# Altium PCB ButtonsBrightnessPCB.PcbDoc
Units mm, origin at the board's own origin, x right, y up, seen from the top; angles counter-clockwise.
Board outline 63.88 x 83.06 mm, 2 copper layers (Top Layer, Bottom Layer); 50 components, 47 nets, 184 pads, 13 vias.
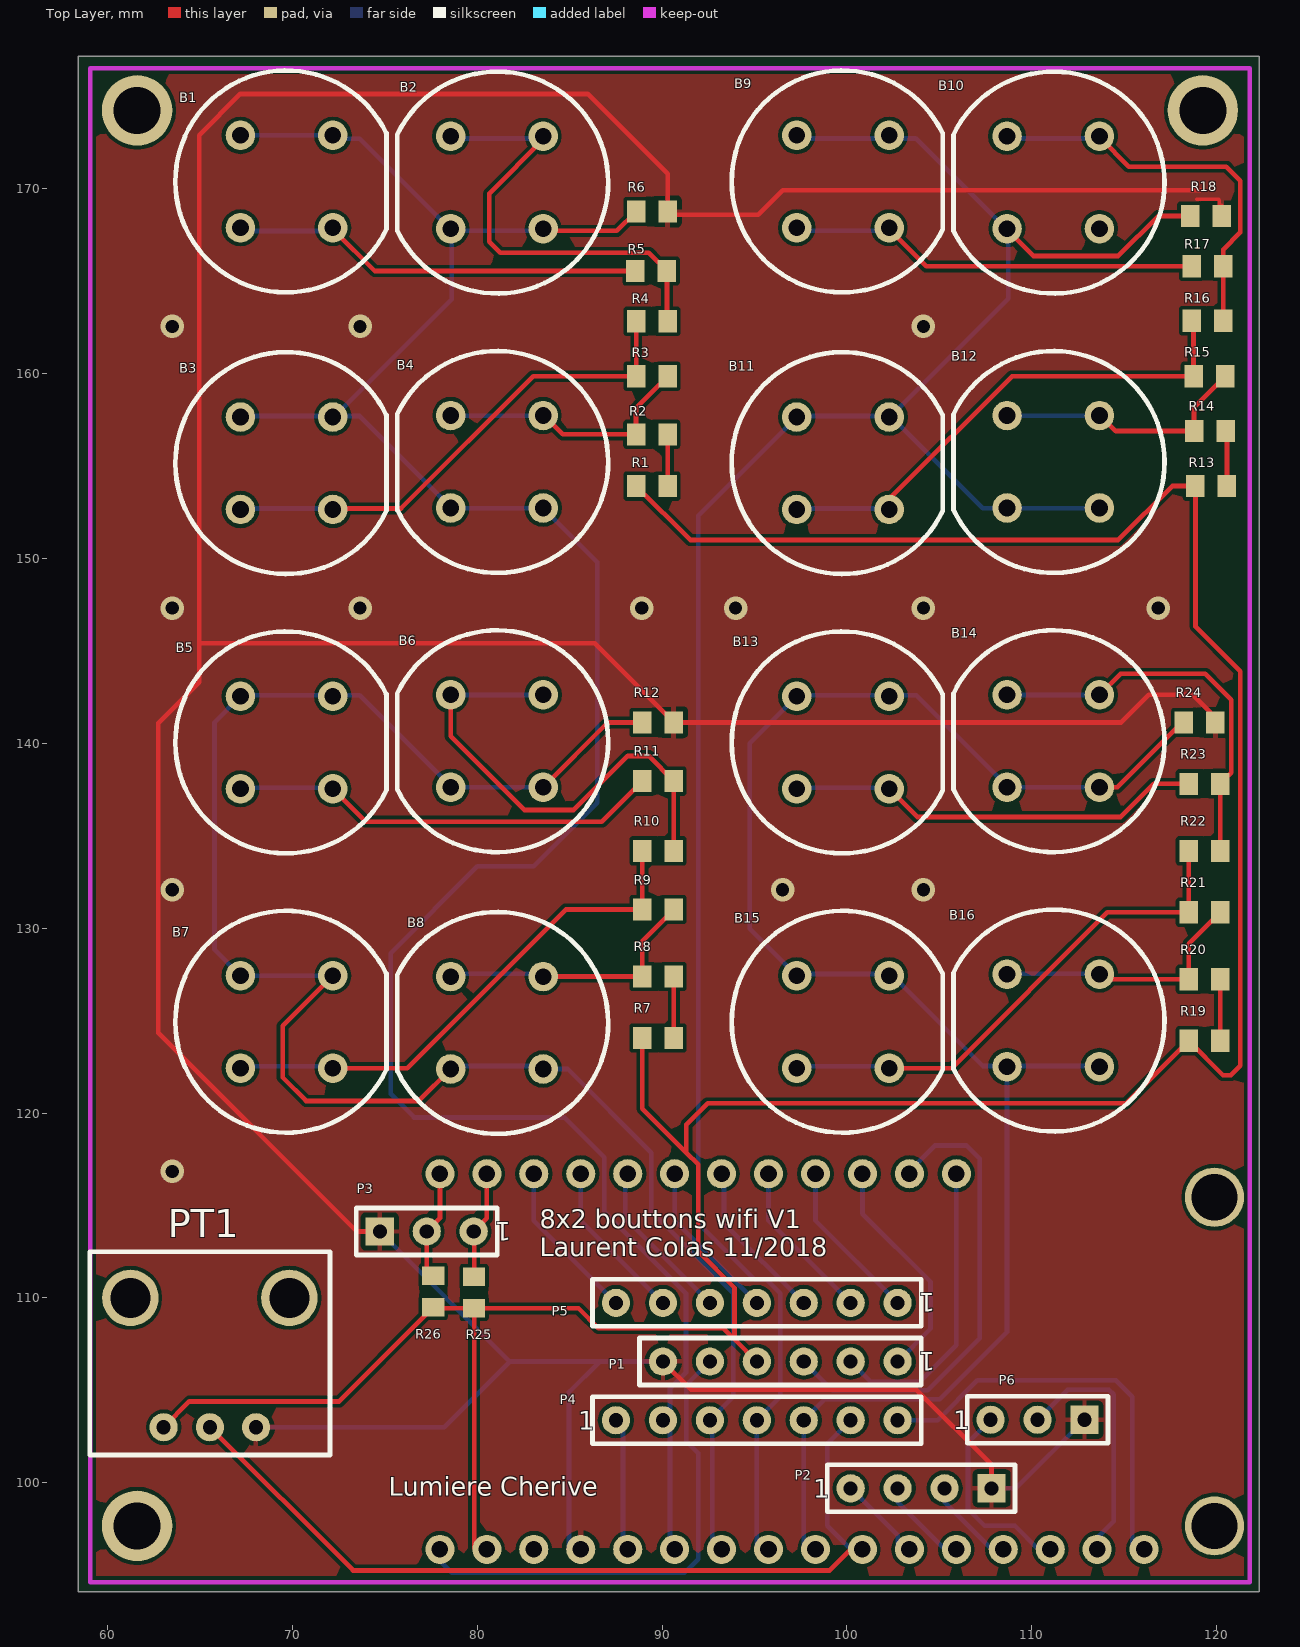
[diagram p0: Top Layer view]
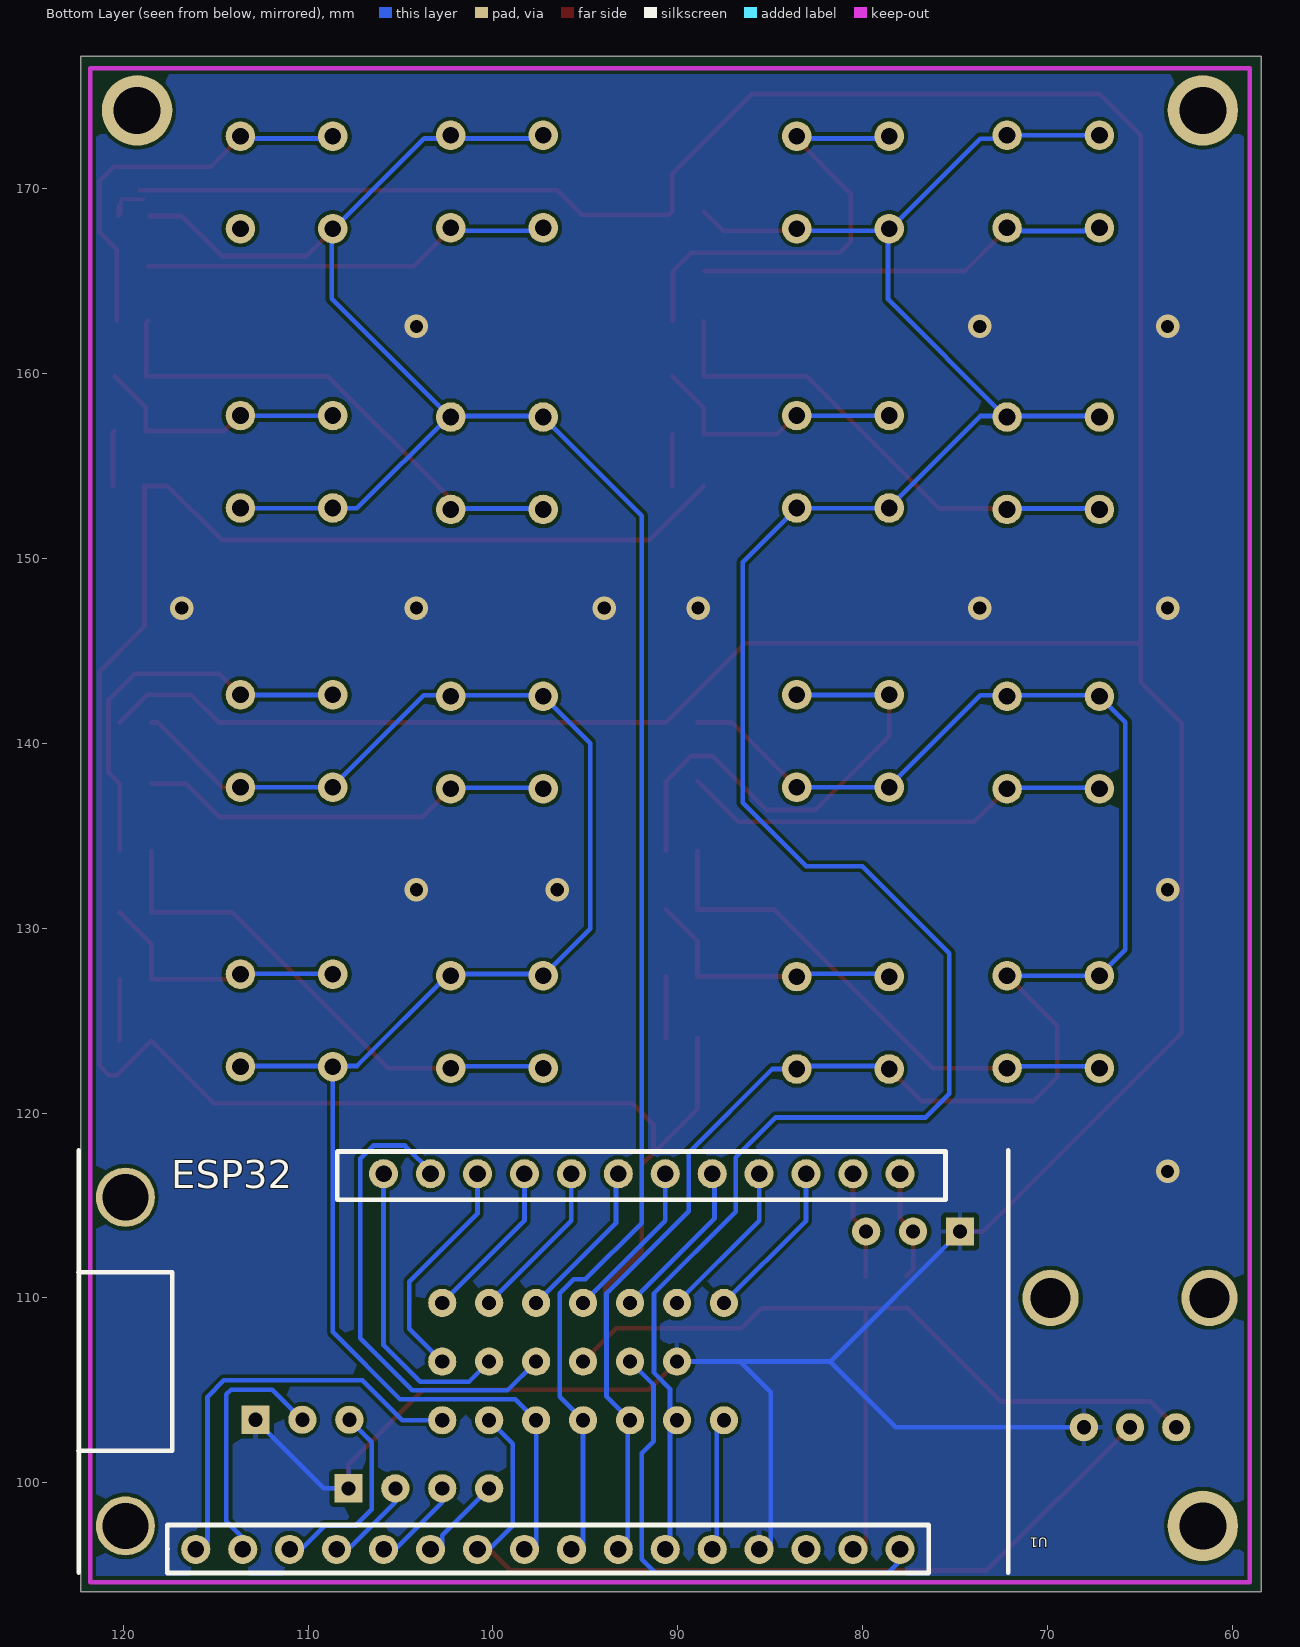
[diagram p1: Bottom Layer view, seen from below]

## Layer stack, top to bottom
Top Solder: solder mask 0.0102, Solder Resist, Dk 3.5
Top Layer: signal copper 0.0356
Dielectric 1: dielectric 0.32, FR-4, Dk 4.8
Bottom Layer: signal copper 0.0356
Bottom Solder: solder mask 0.0102, Solder Resist, Dk 3.5

## Board outline
58.42,94.107 122.301,94.107 122.301,177.165 58.42,177.165

## Design rules (kind name [scope] priority, off if disabled: settings)
Clearance [All] p1: gap=0.203 ignorepadtopadclearanceinfootprint=FALSE
PolygonConnect PolygonConnect_7 [All vs IsNamedPolygon('Bottom Layer-No Net')] p1: thpad.connectstyle=Relief thpad.reliefconductorwidth=0.254 thpad.reliefentries=4 thpad.polygonreliefangle="90 Angle" thpad.airgapwidth=0.254 smdpad.connectstyle=Relief smdpad.reliefconductorwidth=0.254 smdpad.reliefentries=4 smdpad.polygonreliefangle="90 Angle" smdpad.airgapwidth=0.254 via.connectstyle=Direct via.reliefconductorwidth=0.254 via.reliefentries=4 via.polygonreliefangle="90 Angle" via.airgapwidth=0.254
PolygonConnect PolygonConnect_6 [All vs IsNamedPolygon('Bottom Layer-No Net') Or  IsNamedPolygon('Top Layer-No Net')] p2: thpad.connectstyle=Relief thpad.reliefconductorwidth=0.254 thpad.reliefentries=4 thpad.polygonreliefangle="90 Angle" thpad.airgapwidth=0.254 smdpad.connectstyle=Relief smdpad.reliefconductorwidth=0.254 smdpad.reliefentries=4 smdpad.polygonreliefangle="90 Angle" smdpad.airgapwidth=0.254 via.connectstyle=Direct via.reliefconductorwidth=0.254 via.reliefentries=4 via.polygonreliefangle="90 Angle" via.airgapwidth=0.254
PolygonConnect PolygonConnect_5 [All vs IsNamedPolygon('Bottom Layer-No Net')] p3: connectstyle=Relief reliefconductorwidth=0.381 reliefentries=4 polygonreliefangle="90 Angle" airgapwidth=0.254
PolygonConnect PolygonConnect_4 [All vs IsNamedPolygon('Top Layer-No Net')] p4: connectstyle=Relief reliefconductorwidth=0.381 reliefentries=4 polygonreliefangle="90 Angle" airgapwidth=0.254
PolygonConnect PolygonConnect_3 [All vs IsNamedPolygon('Bottom Layer-No Net')] p5: connectstyle=Direct reliefconductorwidth=0.254 reliefentries=4 polygonreliefangle="90 Angle" airgapwidth=0.254
PolygonConnect PolygonConnect_2 [All vs IsNamedPolygon('Top Layer-No Net')] p6: connectstyle=Direct reliefconductorwidth=0.254 reliefentries=4 polygonreliefangle="90 Angle" airgapwidth=0.254
PolygonConnect PolygonConnect_1 [All vs IsNamedPolygon('Bottom Layer-No Net')] p7: thpad.connectstyle=Direct thpad.reliefconductorwidth=0.254 thpad.reliefentries=4 thpad.polygonreliefangle="90 Angle" thpad.airgapwidth=0.254 smdpad.connectstyle=Direct smdpad.reliefconductorwidth=0.254 smdpad.reliefentries=4 smdpad.polygonreliefangle="90 Angle" smdpad.airgapwidth=0.254 via.connectstyle=Relief via.reliefconductorwidth=0.254 via.reliefentries=4 via.polygonreliefangle="90 Angle" via.airgapwidth=0.254
PolygonConnect [All] p8: connectstyle=Relief reliefconductorwidth=0.254 reliefentries=4 polygonreliefangle="90 Angle" airgapwidth=0.254
RoutingVias [All] p1: holewidth=0.635 width=1.016 viastyle="Through Hole" minholewidth=0.711 minwidth=1.27 maxholewidth=0.711 maxwidth=1.27
SolderMaskExpansion [All] p1: expansion=0.102
Width [All] p1: maxlimit=0.508 minlimit=0.203 preferedwidth=0.203
30 further rules are at their usual default settings.

## Components (designator, comment, footprint, x,y, rotation, side; value= is the part's Value field where it differs from the comment)
B1 "Button_D6R90" BUTTON_D6R90 72.136,167.894 r180 top
B2 "Button_D6R90" BUTTON_D6R90 78.613,172.847 r0 top
B3 "Button_D6R90" BUTTON_D6R90 72.136,152.654 r180 top
B4 "Button_D6R90" BUTTON_D6R90 78.613,157.734 r0 top
B5 "Button_D6R90" BUTTON_D6R90 72.136,137.541 r180 top
B6 "Button_D6R90" BUTTON_D6R90 78.613,142.621 r0 top
B7 "Button_D6R90" BUTTON_D6R90 72.136,122.428 r180 top
B8 "Button_D6R90" BUTTON_D6R90 78.613,127.381 r0 top
B9 "Button_D6R90" BUTTON_D6R90 102.235,167.894 r180 top
B10 "Button_D6R90" BUTTON_D6R90 108.712,172.847 r0 top
B11 "Button_D6R90" BUTTON_D6R90 102.232,152.654 r180 top
B12 "Button_D6R90" BUTTON_D6R90 108.712,157.734 r0 top
B13 "Button_D6R90" BUTTON_D6R90 102.235,137.541 r180 top
B14 "Button_D6R90" BUTTON_D6R90 108.712,142.621 r0 top
B15 "Button_D6R90" BUTTON_D6R90 102.235,122.428 r180 top
B16 "Button_D6R90" BUTTON_D6R90 108.712,127.508 r0 top
P1 "Header 6" CONN_6 102.743,106.553 r180 top
P2 "Header 4" CONN_4 100.203,99.695 r0 top
P3 "Header 3" CONN_3 79.807,113.589 r180 top
P4 "Header 7" CONN_7 87.503,103.378 r0 top
P5 "Header 7" CONN_7 102.743,109.728 r180 top
P6 "Header 3" CONN_3 107.772,103.403 r0 top
PT1 "P090S_pot" P090S_POT 63.032,102.997 r0 top
R1 "ERJ-6GEYJ471V" RES_0804_PANASONIC 89.454,153.843 r180 top
R2 "ERJ-6GEYJ471V" RES_0804_PANASONIC 89.444,156.793 r0 top
R3 "ERJ-6GEYJ471V" RES_0804_PANASONIC 89.454,159.786 r180 top
R4 "ERJ-6GEYJ471V" RES_0804_PANASONIC 89.454,162.907 r0 top
R5 "ERJ-6GEYJ471V" RES_0804_PANASONIC 89.408,165.481 r180 top
R6 "ERJ-6GEYJ471V" RES_0804_PANASONIC 89.454,168.85 r0 top
R7 "ERJ-6GEYJ471V" RES_0804_PANASONIC 89.781,123.983 r180 top
R8 "ERJ-6GEYJ471V" RES_0804_PANASONIC 89.781,127.457 r0 top
R9 "ERJ-6GEYJ471V" RES_0804_PANASONIC 89.781,130.932 r180 top
R10 "ERJ-6GEYJ471V" RES_0804_PANASONIC 89.781,134.256 r0 top
R11 "ERJ-6GEYJ471V" RES_0804_PANASONIC 89.781,137.881 r180 top
R12 "ERJ-6GEYJ471V" RES_0804_PANASONIC 89.781,141.205 r0 top
R13 "ERJ-6GEYJ471V" RES_0804_PANASONIC 119.706,153.843 r180 top
R14 "ERJ-6GEYJ471V" RES_0804_PANASONIC 119.634,156.972 r0 top
R15 "ERJ-6GEYJ471V" RES_0804_PANASONIC 119.606,159.786 r180 top
R16 "ERJ-6GEYJ471V" RES_0804_PANASONIC 119.507,162.941 r0 top
R17 "ERJ-6GEYJ471V" RES_0804_PANASONIC 119.507,165.735 r180 top
R18 "ERJ-6GEYJ471V" RES_0804_PANASONIC 119.416,168.604 r0 top
R19 "ERJ-6GEYJ471V" RES_0804_PANASONIC 119.338,123.833 r180 top
R20 "ERJ-6GEYJ471V" RES_0804_PANASONIC 119.338,127.307 r0 top
R21 "ERJ-6GEYJ471V" RES_0804_PANASONIC 119.338,130.782 r180 top
R22 "ERJ-6GEYJ471V" RES_0804_PANASONIC 119.338,134.256 r0 top
R23 "ERJ-6GEYJ471V" RES_0804_PANASONIC 119.338,137.731 r180 top
R24 "ERJ-6GEYJ471V" RES_0804_PANASONIC 119.084,141.205 r0 top
R25 "ERJ-6GEYJ471V" RES_0804_PANASONIC 79.756,110.287 r90 top
R26 "ERJ-6GEYJ471V" RES_0804_PANASONIC 77.546,110.338 r90 top
U1 "ESP32_feather" ESP32_FEATHER 105.918,116.713 r180 bottom

## Footprints (in the part's own frame and the unit in brackets; to place one, negate y for a bottom-side part, rotate by r counter-clockwise, add the part's x,y. Pads: shape width x height; smd on the part's side, far side on the other; paste and mask are expansions set on the pad)
BUTTON_D6R90 [mm]
  round 1.6 hole 0.9: 1(-0.05,0) 2(4.95,0) 3(-0.05,-5) 4(4.95,-5)
  silkscreen extent -2.95,-8.51 8.47,3.49
CONN_3 [mil]
  round 60 hole 30: 1(0,0) 2(100,0)
  rect 60x60 hole 30: 3(200,0)
  silkscreen extent -50,-50 250,50
CONN_4 [mil]
  round 60 hole 30: 1(0,0) 2(100,0) 3(200,0)
  rect 60x60 hole 30: 4(300,0)
  silkscreen extent -50,-50 350,50
CONN_6 [mil]
  round 60 hole 30: 1(0,0) 2(100,0) 3(200,0) 4(300,0) 5(400,0) 6(500,0)
  silkscreen extent -50,-50 550,50
CONN_7 [mil]
  round 60 hole 30: 1(0,0) 2(100,0) 3(200,0) 4(300,0) 5(400,0) 6(500,0) 7(600,0)
  silkscreen extent -50,-50 650,50
ESP32_FEATHER [mil]
  round 62 hole 35.43: 1(0,0) 2(100,0) 3(200,0) 4(300,0) 5(400,0) 6(500,0) 7(600,0) 8(700,0) 9(800,0) 10(900,0) 11(1000,0) 12(1100,0) 13(1100,-800) 14(1000,-800) 15(900,-800) 16(800,-800) 17(700,-800) 18(600,-800) 19(500,-800) 20(400,-800) 21(300,-800) 22(200,-800) 23(100,-800) 24(0,-800) 25(-100,-800) 26(-200,-800) 27(-300,-800) 28(-400,-800)
  round 125.98 hole 98.43: S1(-550,-50) S2(-550,-750)
  silkscreen extent -650,-850 1331,50
P090S_POT [mil]
  round 60 hole 30: 1(0,0) 2(98.43,0) 3(196.85,0)
  round 120 hole 85: 4(-70.87,275.59) 4(267.72,275.59)
  silkscreen extent -157,-59 354,374
RES_0804_PANASONIC [mm]
  rect 1.006x1.2 smd: 1(-0.853,-0.075) 2(0.853,-0.075)

## Part data
P1: "Header, 6-Pin", LatestRevisionDate=17-Jul-2002, LatestRevisionNote="Re-released for DXP Platform.", Publisher="Altium Limited"
P2: "Header, 4-Pin", LatestRevisionDate=17-Jul-2002, LatestRevisionNote="Re-released for DXP Platform.", Publisher="Altium Limited"
P3 P6: "Header, 3-Pin", LatestRevisionDate=17-Jul-2002, LatestRevisionNote="Re-released for DXP Platform.", Publisher="Altium Limited"
P4 P5: "Header, 7-Pin", LatestRevisionDate=17-Jul-2002, LatestRevisionNote="Re-released for DXP Platform.", Publisher="Altium Limited"
R1 R2 R3 R4 R5 R6 R7 R8 R9 R10 R11 R12 R13 R14 R15 R16 R17 R18 R19 R20 R21 R22 R23 R24 R25 R26: Built_By=EMA_UL_Team, C="Copyright (C) 2015 Accelerated Designs. All rights reserved", Manufacturer_Part_Number=ERJ-6GEYJ471V, Vendor=Panasonic

## Free pads (board coordinates)
  round 3.81 hole 2.54: 8(61.595,97.663) 8(61.595,174.244) 9(119.253,174.244)

## Via types
v1: diameter 1.27, hole 0.711, Top Layer to Bottom Layer, 13 vias

## Nets (pads, with @x,y where several pads share a name; then routed paths per layer and width w, separated by ;. In a path a pad name is that pad's centre, name@x,y a point inside that pad or via, vN(x,y) a via of type N, cw(c..) or ccw(c..) an arc to the next point about the centre after c; other vN are vias at no path point)
3.3V: P1.4 PT1.1 R1.2 R7.2 R13.2 R19.2 R25.1 R26.1 U1.14 | length 166.8
  Top Layer w0.254: PT1.1 64.429,104.394 72.53,104.394 R26.1 77.672,109.434 R25.1 ; U1.14@79.883,96.393 79.831,96.445 R25.1 ; R1.2 91.516,151.003 114.681,151.003 117.596,153.918 R13.2 118.853,146.323 121.285,143.891 121.285,122.555 120.777,122.047 120.346,122.047 R19.2 115.1,120.523 92.463,120.523 91.313,119.373 91.313,117.856 ; R7.2 88.928,120.241 91.313,117.856 ; P1.4 93.916,107.759 ; R25.1 85.476,109.434 86.553,108.356 93.32,108.356 93.916,107.759 ; 91.313,117.856 91.948,117.221 91.948,112.522 93.916,110.553 93.916,107.759
A0: P4.1 U1.17 | length 7
  Bottom Layer w0.254: U1.17@87.884,96.393 P4.1@87.884,103.378
A1: B1.3 B1.4 B2.3 B2.4 B3.3 B3.4 B4.3 B4.4 P4.2 R6.1 U1.18 | length 131.2
  Top Layer w0.254: B2.4@83.625,167.725 87.551,167.725 R6.1
  Bottom Layer w0.254: B1.4 B1.3 ; B3.4@67.3,157.708 B3.3@72.3,157.708 ; B1.3@72.298,172.718 73.632,172.718 B2.3@78.625,167.725 ; B4.4 B4.4@83.572,152.725 ; B2.4@83.625,167.725 B2.3@78.625,167.725 ; U1.18@90.424,96.393 U1.18@90.424,96.647 ; U1.18 U1.18@90.424,96.647 ; B3.3@72.3,157.708 73.642,157.708 78.625,152.725 B4.4@83.572,152.725 ; B3.3@72.3,157.708 78.625,164.033 B2.3@78.625,167.725 ; B4.4@83.572,152.725 86.487,149.81 86.487,136.779 83.058,133.35 80.01,133.35 75.311,128.651 75.311,121.031 76.581,119.761 84.709,119.761 86.868,117.602 86.868,114.661 91.288,110.241 91.288,105.943 90.424,105.08 90.424,103.759 P4.2 90.424,102.997 U1.18@90.424,96.647
A2: B5.3 B5.4 B6.3 B6.4 B7.3 B7.4 B8.3 B8.4 P4.3 R12.1 U1.19 | length 99.8
  Top Layer w0.254: B7.3 69.469,124.711 69.469,121.92 70.736,120.653 76.835,120.653 B8.3 ; B6.4 87.072,141.13 R12.1
  Bottom Layer w0.254: B5.4 65.786,141.141 65.786,128.828 B7.4 B7.3 ; B5.4@67.298,142.6 73.642,142.6 78.625,137.617 B6.4@83.625,137.617 ; B8.3@78.625,122.542 B8.4@83.625,122.542 ; B8.4 84.883,122.381 89.408,117.856 89.408,114.681 93.853,110.236 93.853,104.648 92.71,103.505 U1.19@92.71,96.52
A3: B9.3 B9.4 B10.3 B11.3 B11.4 B12.3 B12.4 P4.4 R18.1 U1.20 | length 122
  Top Layer w0.254: B10.3@108.725,167.725 110.08,166.37 114.681,166.37 116.84,168.529 R18.1
  Bottom Layer w0.254: U1.20@95.123,96.393 P4.4 96.393,104.648 96.393,110.236 95.631,110.998 94.996,110.998 91.948,114.046 91.948,152.32 B11.4 ; B11.4@97.375,157.708 B11.3@102.375,157.708 ; B9.4@97.375,172.725 103.725,172.725 108.725,167.725 108.725,164.058 B11.3@102.375,157.708 ; B12.4@113.725,152.725 107.358,152.725 B11.3@102.375,157.708
A4: B13.3 B13.4 B14.3 B14.4 B15.3 B15.4 B16.3 B16.4 P4.5 R24.1 U1.21 | length 94.6
  Top Layer w0.254: B14.4 114.634,137.621 118.143,141.13 R24.1 R24.1@118.485,141.13
  Bottom Layer w0.254: B15.4 94.742,129.971 94.742,139.998 B13.4 ; B15.4@97.375,127.525 102.375,127.525 107.358,122.542 B16.4@113.725,122.542 ; B13.4@97.375,142.6 103.742,142.6 108.725,137.617 B14.4@113.725,137.617 ; U1.21@97.663,96.393 P4.5 98.806,104.521 105.029,104.521 108.662,108.154 B16.3
A5: P4.6 PT1.2 U1.22 | length 46.4
  Top Layer w0.254: PT1.2 73.279,95.25 99.06,95.25 U1.22@100.203,96.393
  Bottom Layer w0.254: U1.22@100.203,96.393 98.933,97.663 98.933,102.108 P4.6
BAT: P1.2 U1.1 | length 16.5
  Bottom Layer w0.254: P1.2 101.295,105.461 103.937,105.461 105.918,107.442 105.918,116.078 U1.1@105.283,116.713
EN: P1.3 U1.2 | length 26.4
  Bottom Layer w0.254: P1.3 99.212,105.004 104.369,105.004 107.188,107.823 107.188,117.533 106.484,118.237 104.762,118.237 103.238,116.713 U1.2@102.743,116.713
GND: P1.6 P2.4 P3.3 P6.3 PT1.3 R6.2 R12.2 R18.2 R24.2 U1.16 | length 258.6
  Top Layer w0.203: 118.939,169.434 120.096,169.434 120.142,169.388 120.142,168.656 R18.2 R18.2@120.269,169.113
  Top Layer w0.254: P3.3 73.482,113.589 62.738,124.333 62.738,141.097 64.955,143.314 64.955,145.415 ; P1.6 91.567,105.029 103.759,105.029 107.823,100.965 P2.4 ; 119.112,169.926 96.52,169.926 95.198,168.604 90.478,168.604 R6.2 90.307,170.805 85.979,175.133 67.183,175.133 64.955,172.905 64.955,145.415 ; R24.2@120.191,141.13 118.7,142.621 116.337,142.621 114.846,141.13 R12.2 86.349,145.415 64.955,145.415
  Bottom Layer w0.254: PT1.3 78.207,102.997 81.763,106.553 ; P3.3 81.763,106.553 ; U1.16@84.963,96.393 84.963,104.902 86.614,106.553 ; P1.6 86.614,106.553 ; P2.4 109.144,99.695 P6.3 ; 81.763,106.553 86.614,106.553
  other v1: 63.5,116.84 63.5,132.08 96.52,132.08 104.14,132.08 63.5,147.32 73.66,147.32 88.9,147.32 93.98,147.32 104.14,147.32 116.84,147.32 63.5,162.56 73.66,162.56 104.14,162.56
IO12: P5.2 U1.5 | length 9.1
  Bottom Layer w0.254: U1.5@95.123,116.713 95.758,116.078 95.758,114.173 P5.2
IO13: P5.1 U1.4 | length 9.1
  Bottom Layer w0.254: U1.4@97.663,116.713 98.298,116.078 98.298,114.173 P5.1
IO14: P5.7 U1.10 | length 9.1
  Bottom Layer w0.254: U1.10@82.423,116.713 83.058,116.078 83.058,114.173 P5.7
IO15: P5.5 U1.8 | length 9.1
  Bottom Layer w0.254: U1.8@87.503,116.713 88.011,116.205 88.011,114.3 P5.5
IO21: P4.7 U1.28 | length 22.2
  Bottom Layer w0.254: P4.7 104.902,103.378 107.061,105.537 114.554,105.537 115.443,104.648 U1.28@115.443,96.393
IO27: P5.3 U1.6 | length 9.1
  Bottom Layer w0.254: U1.6@92.583,116.713 93.345,115.951 93.345,114.046 P5.3
IO32: P5.6 U1.9 | length 9.1
  Bottom Layer w0.254: U1.9@84.963,116.713 85.598,116.078 85.598,114.173 P5.6
IO33: P5.4 U1.7 | length 9.1
  Bottom Layer w0.254: U1.7@90.043,116.713 90.678,116.078 90.678,114.173 P5.4
MISO: P2.3 U1.25 | length 4.4
  Bottom Layer w0.254: P2.3 105.283,98.933 U1.25@107.823,96.393
MOSI: P2.2 U1.24 | length 4.4
  Bottom Layer w0.254: P2.2 102.743,98.933 U1.24@105.283,96.393
NetB1_1: B1.1 B1.2 R5.2 | length 22.2
  Top Layer w0.254: B1.1@72.298,167.718 74.46,165.556 R5.2
  Bottom Layer w0.254: B1.2@67.298,167.718 B1.1@72.298,167.718
NetB2_1: B2.1 B2.2 R4.2 R5.1 | length 24.8
  Top Layer w0.254: B2.2@83.625,172.725 80.645,169.745 80.645,167.132 81.241,166.536 89.281,166.536 R5.1 90.261,162.878 R4.2
  Bottom Layer w0.254: B2.1@78.625,172.725 B2.2@83.625,172.725
NetB3_1: B3.1 B3.2 R3.2 R4.1 | length 27.2
  Top Layer w0.254: B3.1@72.3,152.708 75.873,152.708 83.026,159.861 R3.2 R4.1
  Bottom Layer w0.254: B3.2@67.3,152.708 B3.1@72.3,152.708
NetB4_1: B4.1 B4.2 R2.1 R3.1 | length 14.3
  Top Layer w0.254: B4.2@83.625,157.794 83.625,157.725 84.632,156.718 R2.1 88.591,158.145 R3.1
  Bottom Layer w0.254: B4.1@78.625,157.725 B4.2@83.625,157.725
NetB5_1: B5.1 B5.2 R11.2 | length 23.4
  Top Layer w0.254: B5.1 73.964,135.763 86.735,135.763 R11.2
  Bottom Layer w0.254: B5.2@67.298,137.6 B5.1@72.298,137.6
NetB6_1: B6.1 B6.2 R10.2 R11.1 | length 26.5
  Top Layer w0.254: B6.1 78.563,140.385 82.55,136.398 85.217,136.398 88.138,139.319 89.271,139.319 R11.1 R10.2
  Bottom Layer w0.254: B6.1@78.625,142.617 B6.2@83.625,142.617
NetB7_1: B7.1 B7.2 R9.2 R10.1 | length 28.5
  Top Layer w0.254: B7.1 76.2,122.428 84.779,131.007 R9.2 R10.1
  Bottom Layer w0.254: B7.2@67.298,122.525 B7.1@72.298,122.525
NetB8_1: B8.1 B8.2 R8.1 R9.1 | length 14.7
  Top Layer w0.254: B8.2 83.564,127.382 R8.1 88.928,129.301 R9.1
  Bottom Layer w0.254: B8.1@78.625,127.542 B8.2@83.625,127.542
NetB9_1: B9.1 B9.2 R17.2 | length 22.1
  Top Layer w0.254: B9.1@102.375,167.725 104.29,165.81 R17.2
  Bottom Layer w0.254: B9.2@97.375,167.725 B9.1@102.375,167.725
NetB10_1: B10.1 B10.2 R16.2 R17.1 | length 21.5
  Top Layer w0.254: B10.2@113.725,172.725 115.254,171.196 120.523,171.196 121.285,170.434 121.285,167.64 120.36,166.715 R17.1 R16.2
  Bottom Layer w0.254: B10.1@108.725,172.725 B10.2@113.725,172.725
NetB11_1: B11.1 B11.2 R15.2 R16.1 | length 27.7
  Top Layer w0.254: B11.1@102.375,152.708 102.375,153.302 108.934,159.861 R15.2 118.753,162.767 R16.1
  Bottom Layer w0.254: B11.2@97.375,152.708 B11.1@102.375,152.708
NetB12_1: B12.1 B12.2 R14.1 R15.1 | length 14.1
  Top Layer w0.254: B12.2@113.725,157.725 114.553,156.897 R14.1 118.781,158.183 R15.1
  Bottom Layer w0.254: B12.1@108.725,157.725 B12.2@113.725,157.725
NetB13_1: B13.1 B13.2 R23.2 | length 22.6
  Top Layer w0.254: B13.1 103.809,136.017 114.808,136.017 116.597,137.806 R23.2
  Bottom Layer w0.254: B13.2@97.375,137.6 B13.1@102.375,137.6
NetB14_1: B14.1 B14.2 R22.2 R23.1 | length 21.6
  Top Layer w0.254: B14.2 114.805,143.764 119.38,143.764 120.795,142.349 120.795,138.41 R23.1 R22.2
  Bottom Layer w0.254: B14.1@108.725,142.617 B14.2@113.725,142.617
NetB15_1: B15.1 B15.2 R21.2 R22.1 | length 28
  Top Layer w0.254: B15.1 105.664,122.428 114.093,130.857 R21.2 R22.1
  Bottom Layer w0.254: B15.2@97.375,122.525 B15.1@102.375,122.525
NetB16_1: B16.1 B16.2 R20.1 R21.1 | length 14.3
  Top Layer w0.254: B16.2 113.938,127.232 R20.1 118.485,129.151 R21.1
  Bottom Layer w0.254: B16.1@108.725,127.542 B16.2@113.725,127.542
NetR1_1: R1.1 R2.2 | length 2.8
  Top Layer w0.254: R2.2 90.307,156.708 R1.1
NetR7_1: R7.1 R8.2 | length 3.3
  Top Layer w0.254: R7.1 R8.2
NetR13_1: R13.1 R14.2 | length 3
  Top Layer w0.254: R14.2 120.559,156.825 R13.1
NetR19_1: R19.1 R20.2 | length 3.3
  Top Layer w0.254: R19.1 R20.2
RST: P1.5 U1.13 | length 26.9
  Bottom Layer w0.254: U1.13@77.343,96.393 78.613,95.123 91.211,95.123 91.948,95.86 91.948,101.6 91.313,102.235 91.313,105.283 P1.5
RX: P6.1 U1.26 | length 10.1
  Bottom Layer w0.254: P6.1 106.553,102.184 106.553,98.552 107.442,97.663 109.093,97.663 U1.26@110.363,96.393
SCK: P2.1 U1.23 | length 4.4
  Bottom Layer w0.254: P2.1 102.743,97.155 U1.23@102.743,96.393
SCL: P3.1 R25.2 U1.11 | length 6.1
  Top Layer w0.254: R25.2 79.831,113.565 P3.1 80.518,114.3 80.518,116.078 U1.11@79.883,116.713
SDA: P3.2 R26.2 U1.12 | length 6.2
  Top Layer w0.254: U1.12@77.343,116.713 77.978,116.078 77.978,114.3 P3.2 77.267,111.545 R26.2
TX: P6.2 U1.27 | length 13.9
  Bottom Layer w0.254: P6.2 111.938,105.029 114.173,105.029 114.427,104.775 114.427,97.917 U1.27@112.903,96.393
USB: P1.1 U1.3 | length 12.7
  Bottom Layer w0.254: U1.3@100.203,116.713 100.838,116.078 100.838,114.554 104.521,110.871 104.521,108.331 P1.1
pads on no net: B10.4 PT1.4 U1.15 U1.S1 U1.S2

## Polygon pours and split planes (outlines as drawn)
GND on Top Layer "Top Layer-No Net" (solid, remove dead copper, pour order 2): 59.055,176.53 121.793,176.53 121.793,94.615 59.055,94.615
GND on Bottom Layer "Bottom Layer-No Net" (solid, remove dead copper, pour order 4): 59.055,176.53 121.793,176.53 121.793,94.615 59.055,94.615

## Keep-outs
Keep-Out Layer:
  lines w0.254: 59.055,94.615 121.793,94.615 121.793,176.53 59.055,176.53 59.055,94.615

## Silkscreen, mask and mechanical layers (free items; w line width, h text height)
Top Overlay:
  text "8x2 bouttons wifi V1 / Laurent Colas 11/2018" at 83.388,112.243 h1.02
  text "Lumiere Cherive" at 75.209,99.289 h1.02
Mechanical 1:
  lines w0.254: 58.42,94.107 122.428,94.107 122.428,177.165 58.42,177.165 58.42,94.107

## Text inside footprints (layer, text, board x,y; h text height)
P1: Top Overlay "1" at 104.775,107.061 h1.02 r180
P2: Top Overlay "1" at 98.171,99.187 h1.02
P3: Top Overlay "1" at 81.839,114.097 h1.02 r180
P4: Top Overlay "1" at 85.471,102.87 h1.02
P5: Top Overlay "1" at 104.775,110.236 h1.02 r180
P6: Top Overlay "1" at 105.74,102.895 h1.02
U1: Bottom Overlay "ESP32" at 117.418,115.938 h1.52